# EAGLE board usblirc_v1 (EAGLE 5.02)
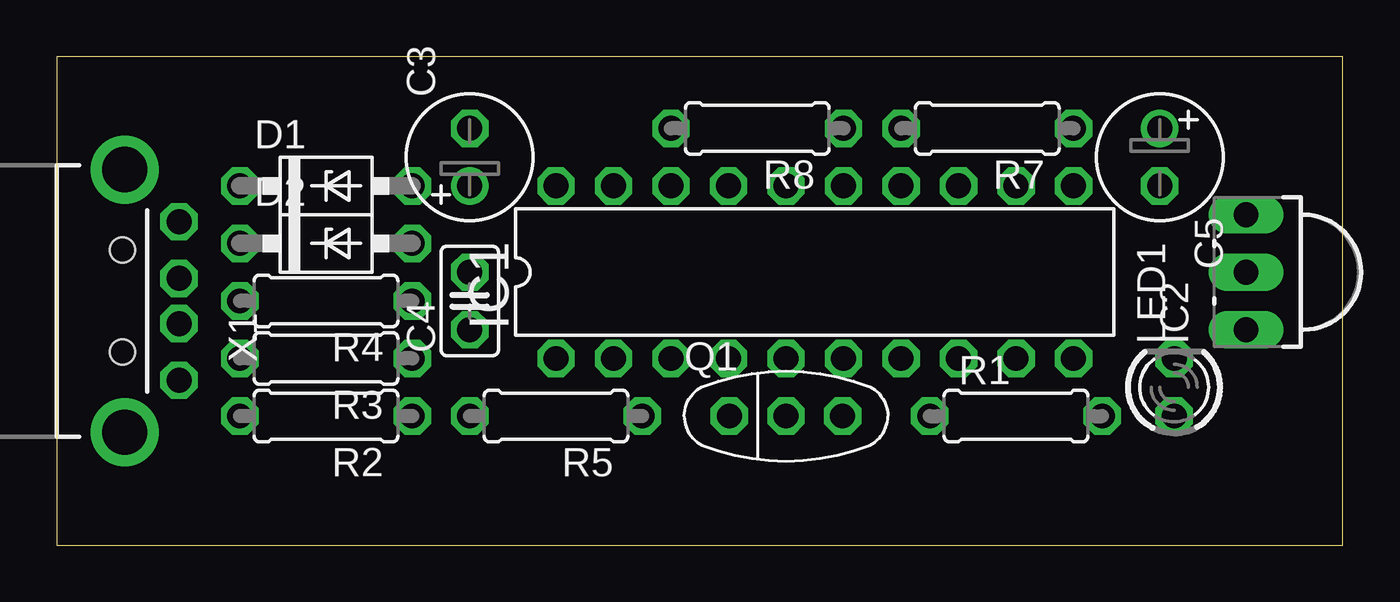
[diagram p0: board, top side]
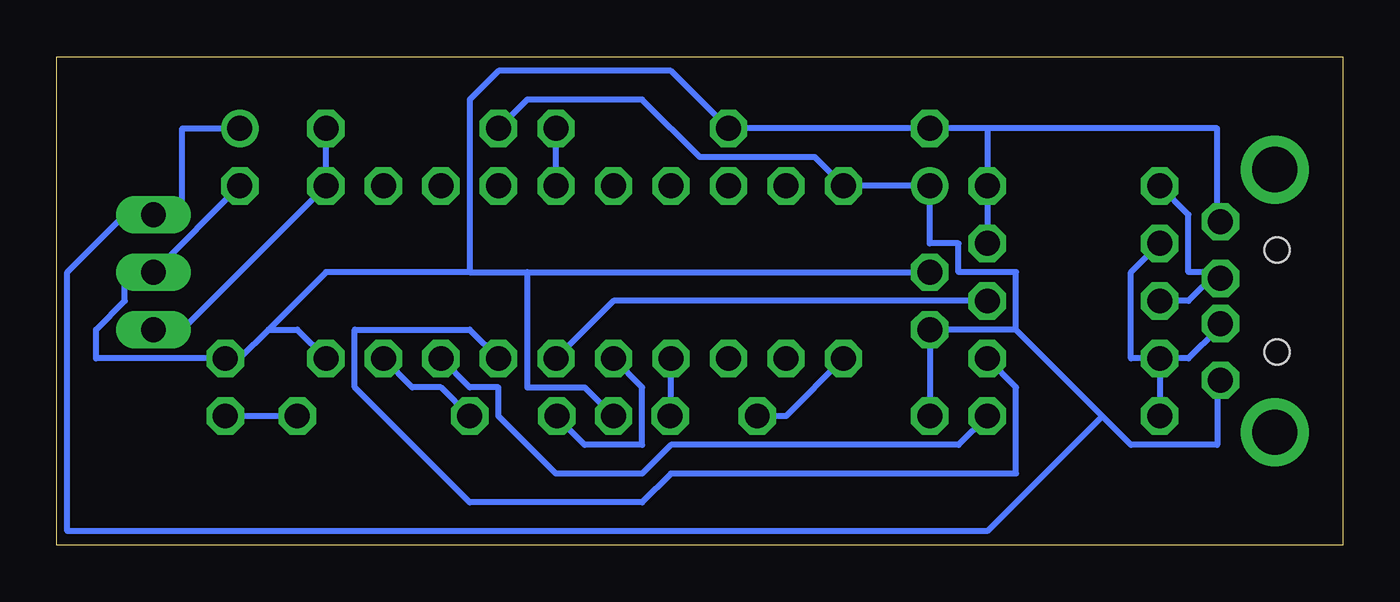
[diagram p1: board, bottom side, seen from below]

Size 56.82 x 21.58 mm. Coordinates in mm from the lower left corner, seen from the top.
Outline: 0,0 56.82,0 56.82,21.58 0,21.58 0,0
Copper layers (1*16): Top 0.035mm / dielectric 1.5mm / Bottom 0.035mm
Design rules "default": minimum track width 10mil, minimum drill 24mil, track to track 8mil, track to pad 8mil, pad to pad 8mil, via to via 8mil, smd to smd 8mil, copper to edge 40mil, drill to drill 8mil, minimum pad ring 10mil, minimum via ring 8mil, stop-mask expansion 4mil, vias tented up to drill 0mil, thermal gap 10mil

## Footprints (pad centres in the part's own frame; a part is rotated, then mirrored left to right if it is on the bottom)
E2,5-6 = drill 1.1 round: + -1.27,0 | drill 1.1 pad 1.6 octagon: - 1.27,0
C025-025X050 = drill 1.1 octagon: 1 -1.27,0; 2 1.27,0
DO41Z10 = drill 1.1 octagon: A 3.81,0; C -3.81,0
DIL20 = drill 1.1 octagon: 1 -11.43,-3.81; 2 -8.89,-3.81; 3 -6.35,-3.81; 4 -3.81,-3.81; 5 -1.27,-3.81; 6 1.27,-3.81; 7 3.81,-3.81; 8 6.35,-3.81; 9 8.89,-3.81; 10 11.43,-3.81; 11 11.43,3.81; 12 8.89,3.81; 13 6.35,3.81; 14 3.81,3.81; 15 1.27,3.81; 16 -1.27,3.81; 17 -3.81,3.81; 18 -6.35,3.81; 19 -8.89,3.81; 20 -11.43,3.81
PHSC38 = drill 1.1 long: 1 -2.54,0; 2 0,0; 3 2.54,0
LED3MM = drill 1.1 octagon: A -1.27,0; K 1.27,0
CSTLS_G9 = drill 1.1 octagon: 1 -2.5,0; 2 0,0; 3 2.5,0
0207/7 = drill 1.1 octagon: 1 -3.81,0; 2 3.81,0
USB-A-H = drill 1.1 octagon: D+ 2.4,1; D- 2.4,-1; GND 2.4,3.5; VBUS 2.4,-3.5 | drill 2 round: GND@1 0,5.8; GND@2 0,-5.8 | hole 1.1: -0.1,2.25; -0.1,-2.25

## Placement (x,y rotation side)
C3  100uF  [E2,5-6]  18.25,17.14 90 top
C4  [C025-025X050]  18.25,10.79 90 top
C5  47uF  [E2,5-6]  48.73,17.14 270 top
D1  1N4728  [DO41Z10]  11.9,15.87 0 top
D2  1N4728  [DO41Z10]  11.9,13.33 0 top
IC1  AT90S2313P  [DIL20]  33.49,12.06 0 top
IC2  PHSC38  [PHSC38]  52.54,12.06 90 top
LED1  [LED3MM]  49.37,6.98 90 top
Q1  [CSTLS_G9]  32.22,5.71 0 top
R1  1k  [0207/7]  42.38,5.71 0 top
R2  68  [0207/7]  11.9,5.71 180 top
R3  1k5  [0207/7]  11.9,8.25 180 top
R4  68  [0207/7]  11.9,10.79 180 top
R5  10k  [0207/7]  22.06,5.71 180 top
R7  10k  [0207/7]  41.11,18.41 180 top
R8  22k  [0207/7]  30.95,18.41 180 top
X1  USB-A-H  [USB-A-H]  3.01,10.79 0 top

## Library data of the parts
C3-C5 D1 D2 IC1 IC2 LED1 Q1 R1-R5 R7 R8 X1 = USBtiny-Lirc

## Nets
+5V: C3.+ C4.1 C5.+ IC1.20 IC2.3 R5.2 R7.2 X1.VBUS
GND: C3.- C4.2 C5.- D1.A D2.A IC1.10 IC2.2 LED1.K Q1.2 R8.2 X1.GND
N$1: IC1.9 R1.1
N$2: LED1.A R1.2
N$3: IC1.4 Q1.1
N$4: IC1.5 Q1.3
N$6: D2.C R2.2 R3.2 X1.D-
N$7: IC1.8 R2.1
N$8: IC1.7 R3.1
N$9: D1.C R4.2 X1.D+
N$10: IC1.6 R4.1
N$12: IC1.1 R5.1
N$14: IC1.15 R8.1
N$17: IC1.11 IC2.1 R7.1

## Tracks (layer width: path | path; a pad name or v marks a point on that pad's centre or on a via)
+5V
  Bottom 0.254: R7.2 36.03,19.68 30.95,19.68 28.41,17.14 23.33,17.14 IC1.20 C3.+ 18.25,13.33 16.98,13.33 16.98,12.06 14.44,12.06 14.44,9.52 | C5.+ 51.27,18.41 51.27,14.6 IC2.3 53.81,14.6 56.35,12.06 56.35,0.63 15.71,0.63 10.63,5.71 | R5.2 C4.1 14.44,9.52 | 10.63,5.71 14.44,9.52 | 10.63,5.71 9.36,4.44 5.55,4.44 5.55,6.98 X1.VBUS
GND
  Bottom 0.254: D2.A D1.A 15.71,18.41 | 15.71,18.41 C3.- R8.2 29.68,20.95 37.3,20.95 38.57,19.68 38.57,12.06 | 15.71,18.41 5.55,18.41 5.55,14.6 X1.GND | C5.- IC2.2 53.81,12.06 53.81,10.79 55.08,9.52 55.08,8.25 LED1.K 48.73,8.25 47.46,9.52 | 38.57,12.06 44.92,12.06 47.46,9.52 | 38.57,12.06 36.03,12.06 | 36.03,12.06 C4.2 | Q1.2 33.49,6.98 36.03,6.98 36.03,12.06 | IC1.10 46.19,9.52 47.46,9.52
N$1
  Bottom 0.254: R1.1 39.84,6.98 41.11,6.98 IC1.9
N$2
  Bottom 0.254: R1.2 LED1.A
N$3
  Bottom 0.254: IC1.4 29.68,5.71 Q1.1
N$4
  Bottom 0.254: IC1.5 30.95,6.98 30.95,4.44 33.49,4.44 34.76,5.71 Q1.3
N$6
  Bottom 0.254: R3.2 R2.2 | R3.2 6.82,8.25 5.55,9.52 X1.D- | D2.C 9.36,12.06 9.36,8.25 R3.2
N$7
  Bottom 0.254: R2.1 16.98,4.44 29.68,4.44 30.95,3.17 34.76,3.17 37.3,5.71 37.3,6.98 38.57,6.98 IC1.8
N$8
  Bottom 0.254: R3.1 14.44,6.98 14.44,3.17 29.68,3.17 30.95,1.9 38.57,1.9 43.65,6.98 43.65,9.52 38.57,9.52 IC1.7
N$9
  Bottom 0.254: 5.55,12.06 6.82,10.79 R4.2 | D1.C 6.82,14.6 6.82,12.06 5.55,12.06 | X1.D+ 5.55,12.06
N$10
  Bottom 0.254: IC1.6 32.22,10.79 R4.1
N$12
  Bottom 0.254: IC1.1 24.6,5.71 R5.1
N$14
  Bottom 0.254: IC1.15 R8.1
N$17
  Bottom 0.254: IC2.1 51.27,9.52 IC1.11 R7.1